# Altium PCB IM_v1.1.PcbDoc (part 2 of 4)
Units mm, origin at the board's own origin, x right, y up, seen from the top; angles counter-clockwise.
Board outline 120 x 85 mm, 4 copper layers (Top Layer, S2, S3, Bottom Layer), stack 1.516 mm thick; 285 components, 245 nets, 1048 pads, 482 vias.
Unrouted connection lines stored in the file: 53.
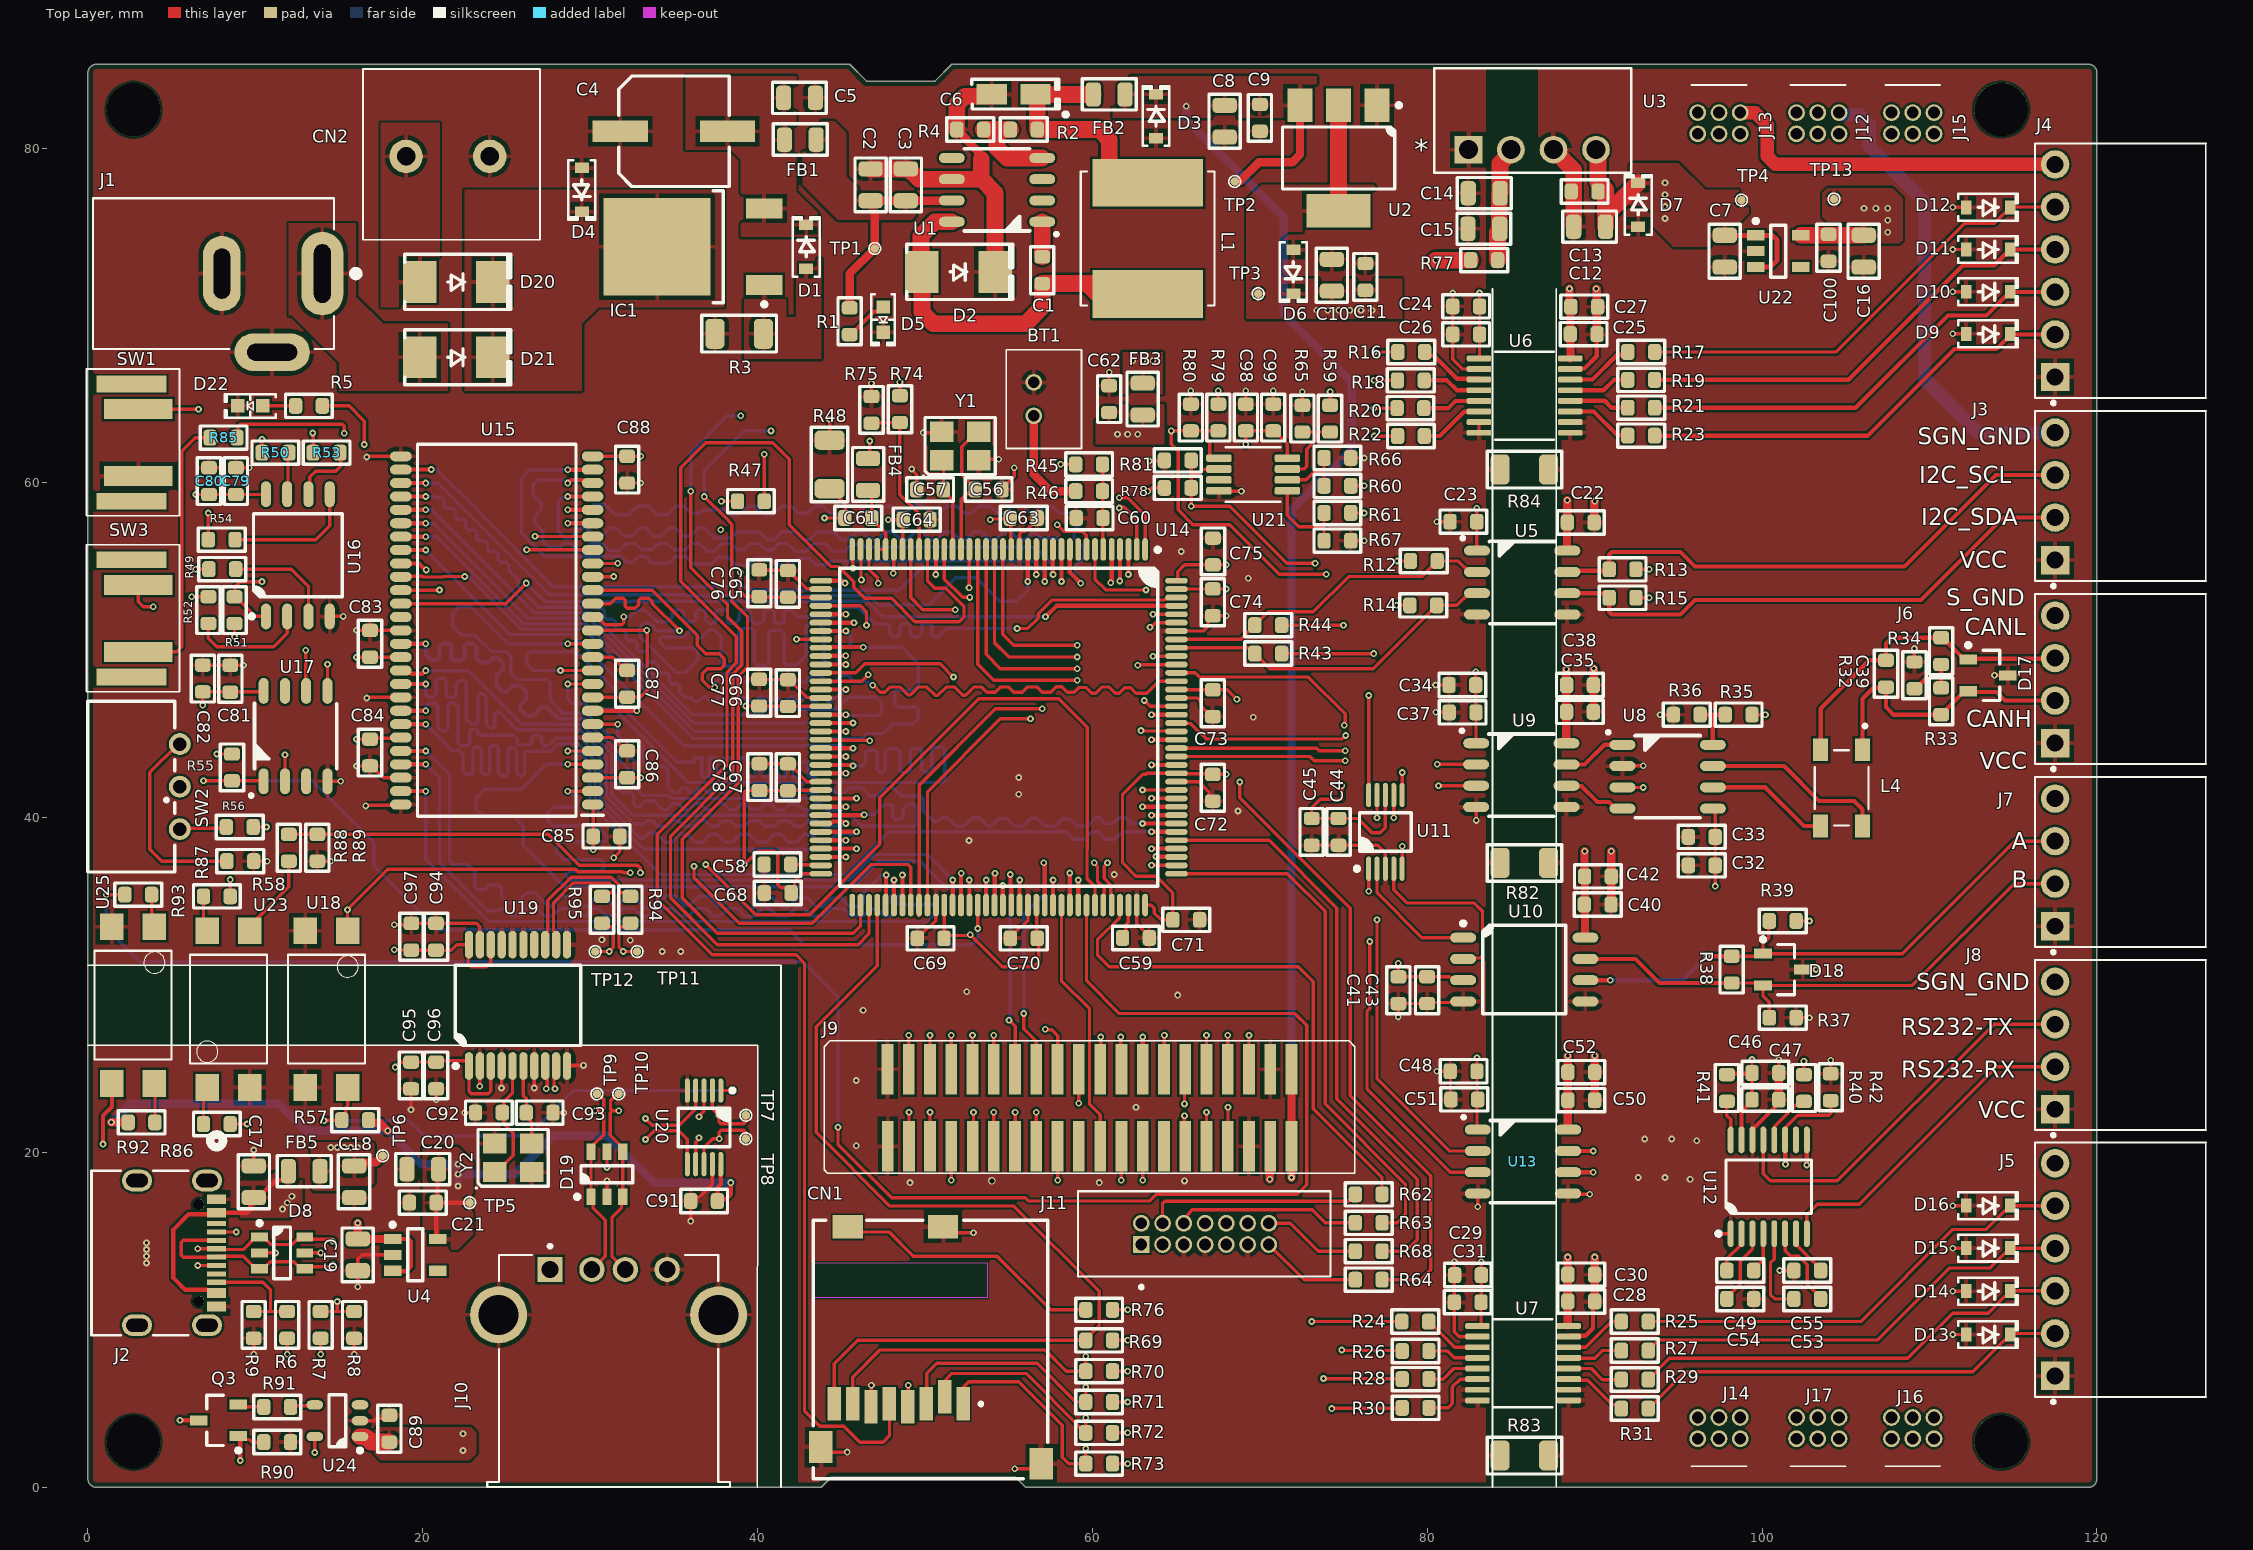
[diagram p0: Top Layer view]

## Via types
v1: diameter 0.4, hole 0.2, Top Layer to Bottom Layer, tented both sides, 473 vias
v2: diameter 0.4, hole 0.2, Top Layer to Bottom Layer, 8 vias
v3: diameter 0.45, hole 0.3, Top Layer to Bottom Layer, tented both sides, 1 vias

## Nets (pads, with @x,y where several pads share a name; then routed paths per layer and width w, separated by ;. In a path a pad name is that pad's centre, name@x,y a point inside that pad or via, vN(x,y) a via of type N, cw(c..) or ccw(c..) an arc to the next point about the centre after c; other vN are vias at no path point) (continued)
+3.3VDC: (continued)
  Top Layer w0.2: SW3.1@3,53.9 3,52.9 3.298,52.602 v1(3.898,52.602) ; v1(6.424,54.845) R49.1@7.224,54.845 ; v1(6.432,59.302) C80.2@7.232,59.302 C79.1@8.832,59.302 10.613,59.302 U16.8@10.632,59.32 ; v1(6.859,46.709) C82.2@6.859,47.509 10.434,47.509 U17.8@10.495,47.57 ; v1(7.7,43.8) R55.1@8.5,43.8 ; v1(8.755,50.796) R51.1@8.755,51.596 ; R56.1@9.862,39.439 v1(10.662,39.439) ; R50.1@10.4,61.8 v1(10.4,62.6) ; v1(16.045,44.689) C84.1@16.845,44.689 16.893,44.737 18.641,44.737 U15.49@18.689,44.785 ; v1(16.045,49.585) C83.1@16.845,49.585 U15.43@18.689,49.585 ; v1(18.3,32.1) 18.306,32.094 19.022,32.094 19.029,32.1 C97.2@19.033,32.1 ; C97.2@19.313,32.088 C94.2@20.783,32.088 21.688,32.088 22.015,32.415 U19.20@22.762,32.415 22.705,32.358 22.705,31.305 22.7,31.3 22.9,31.1 23.8,31.1 24.062,31.362 U19.18@24.062,32.415 ; U15.1@30.145,40.785 30.173,40.757 C85.1@30.173,38.883 v1(30.173,38.083) ; U15.9@30.145,47.185 30.154,47.193 C87.1@32.239,47.193 ; U15.14@30.145,51.185 v1(33.385,51.185) 33.4,51.169 33.4,47.6 33.002,47.202 C87.1@32.209,47.202 ; U15.27@30.145,61.585 30.147,61.587 32.208,61.587 C88.1@32.21,61.588 v1(33.01,61.588) ; v1(33.009,42.386) C86.1@32.209,42.386 32.209,42.386 U15.3@30.146,42.386 ; v1(37.838,58.895) 37.841,58.897 38.797,58.897 R47.1@38.8,58.9 R47.1@39.1,58.9 ; R74.1@48.5,65.2 v1(48.5,66) ; CN1.4@48.998,4.526 v1(48.998,6.102) ; R73.1@61.2,1.414 v1(62.1,1.414) ; R72.1@61.2,3.254 v1(62.1,3.254) ; R71.1@61.2,5.094 v1(62.1,5.094) ; R70.1@61.2,6.934 v1(62.1,6.934) ; R69.1@61.2,8.774 v1(62.1,8.774) ; v1(63.3,59.5) 63.354,59.5 63.554,59.7 R78.2@64.3,59.7 ; R79.2@67.52,64.7 v1(67.52,65.5) ; v1(69.16,62.3) C98.1@69.16,63.1 C99.2@70.8,63.1 ; C99.2@70.875,63.1 71.645,62.33 U21.8@71.645,61.475 ; R43.1@71.3,49.8 v1(76.8,49.8) ; R44.1@71.3,51.5 v1(75,51.5) ; R59.1@74.197,64.635 v1(74.197,65.435) ; v1(74.9,41.9) 74.9,41.1 73.6,41.1 73.1,40.6 C45.1@73.1,39.95 C44.2@74.7,39.95 75.85,39.95 76.7,39.1 77.2,39.1 77.5,39.4 U11.8@77.5,41.35 ; R61.1@75.435,58.2 v1(76.235,58.2) ; R60.1@75.435,59.822 v1(76.235,59.822) ; v1(78.163,52.678) R14.1@78.963,52.678 ; v1(78.197,55.334) R12.2@78.997,55.334 ; v1(78.273,31.292) C41.2@78.273,30.492 78.274,30.494 79.994,30.494 C43.1@79.995,30.495 81.357,30.495 81.562,30.29 U10.3@82.145,30.29 ; C34.2@82.898,47.923 C34.2@82.904,47.918 ; v1(82.904,48.718) C34.2@82.904,47.918 ; U9.1@82.921,44.444 82.909,44.456 C37.1@82.909,46.287 82.904,46.292 C34.2@82.904,47.918 ; v1(82.961,58.476) C23.2@82.961,57.676 82.961,55.953 U5.1@82.969,55.945 ; v1(82.969,25.651) C48.2@82.969,24.851 82.969,21.41 U13.1@83.018,21.36 ; U7.1@83,9.635 83.135,9.635 83.213,9.713 C31.1@83.213,11.054 83.222,11.063 83.222,12.667 C29.2@83.232,12.677 v1(83.232,13.477) ; U6.1@83.088,67.435 83.122,67.469 C26.1@83.122,68.869 C24.2@83.122,70.542 v1(83.122,71.342) ; U15.3@30.145,42.385 U15.3@30.146,42.386
  Top Layer w0.5: v1(70.6,18.4) 70.6,20.345 J9.4@70.62,20.365
  Top Layer w1: U2.4@74.7,76.25 U2.2@74.7,82.55
  other v1: 62.4,67.3 63,67.3 63.6,67.3 73.4,70.3 74.06,70.3 74.72,70.3 75.38,70.3 76.04,70.3 76.7,70.3

## Text inside footprints (layer, text, board x,y; h text height)
SW2: Mechanical 2 "Switch Edge" at -0.714,40.353 h0.41 r90; Mechanical 2 "PCB Edge" at 0.786,40.453 h0.41 r90